# Altium PCB CP2102.PcbDoc
Units mil, origin at the board's own origin, x right, y up, seen from the top; angles counter-clockwise.
Board outline 1305 x 1305 mil, 2 copper layers (Top Layer, Bottom Layer); 24 components, 28 nets, 120 pads, 42 vias.
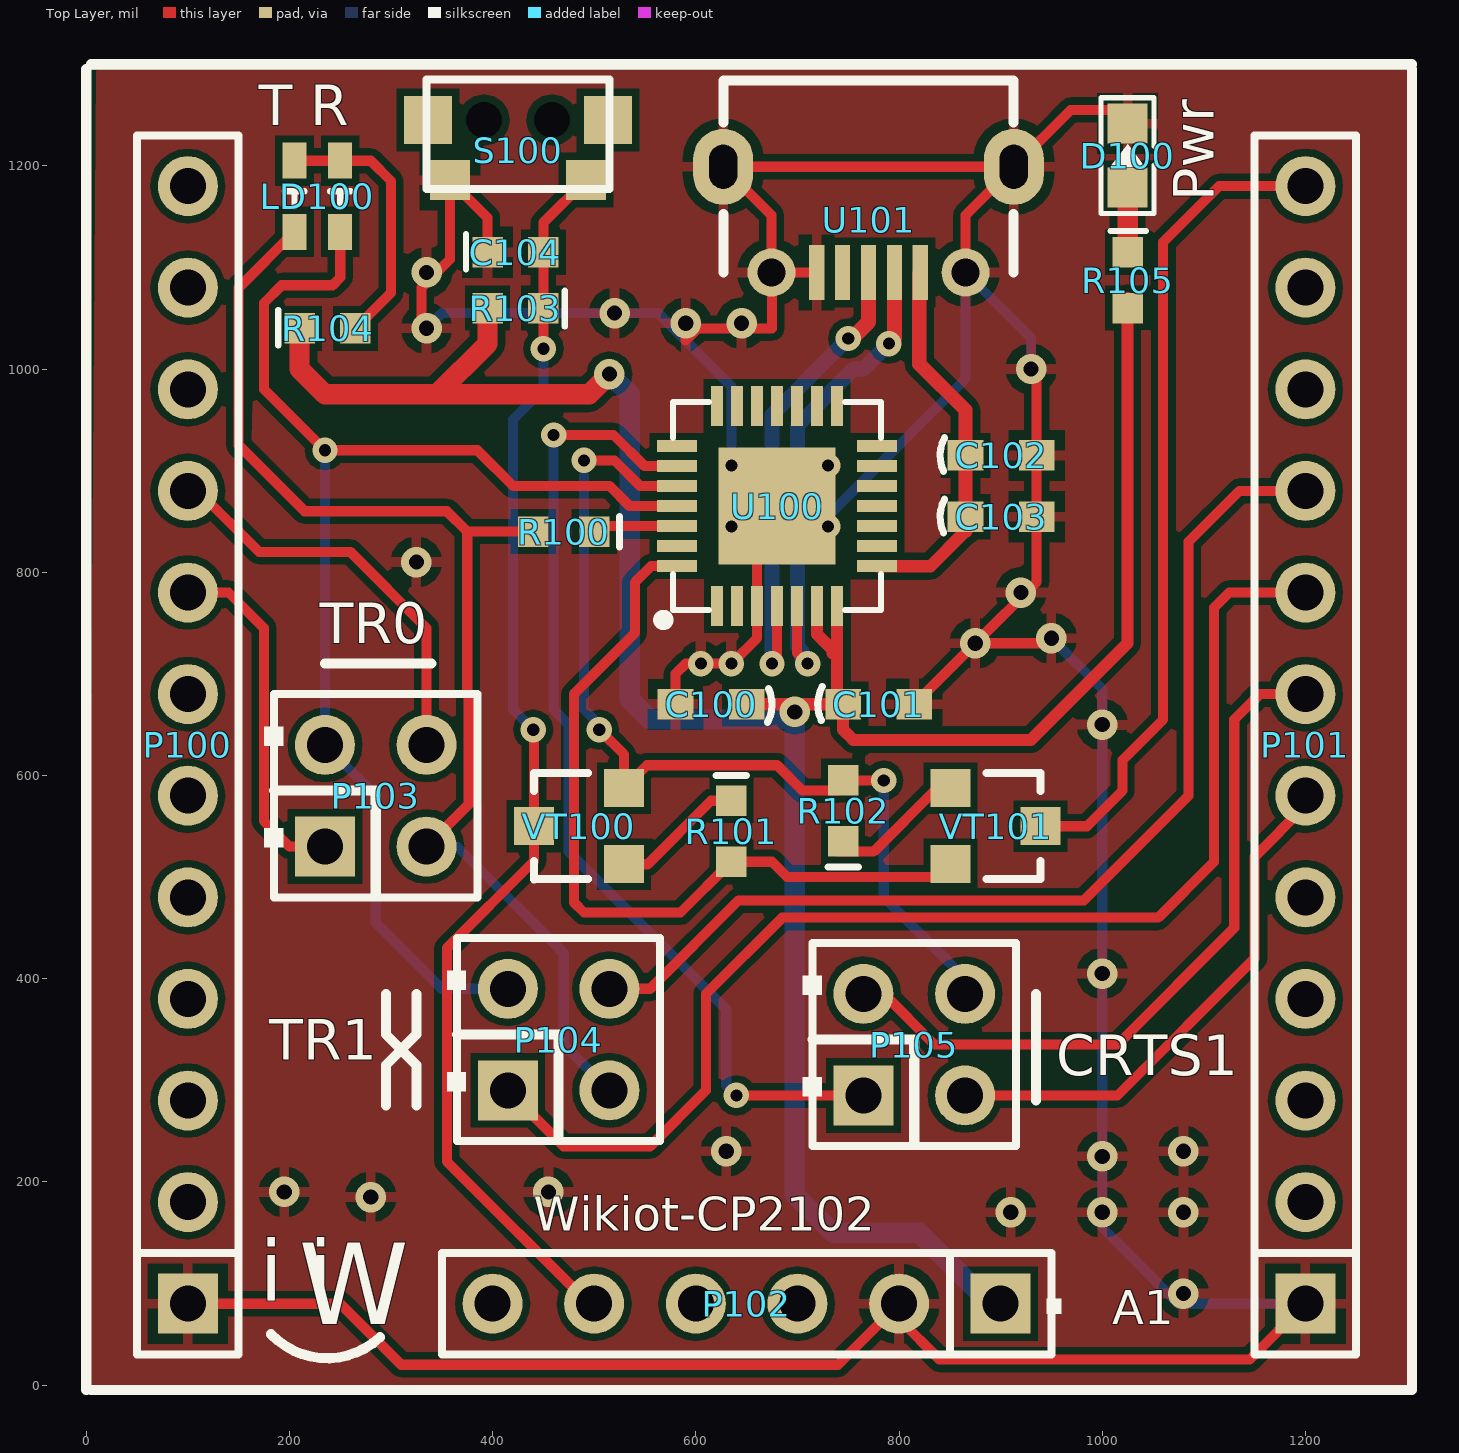
[diagram p0: Top Layer view]
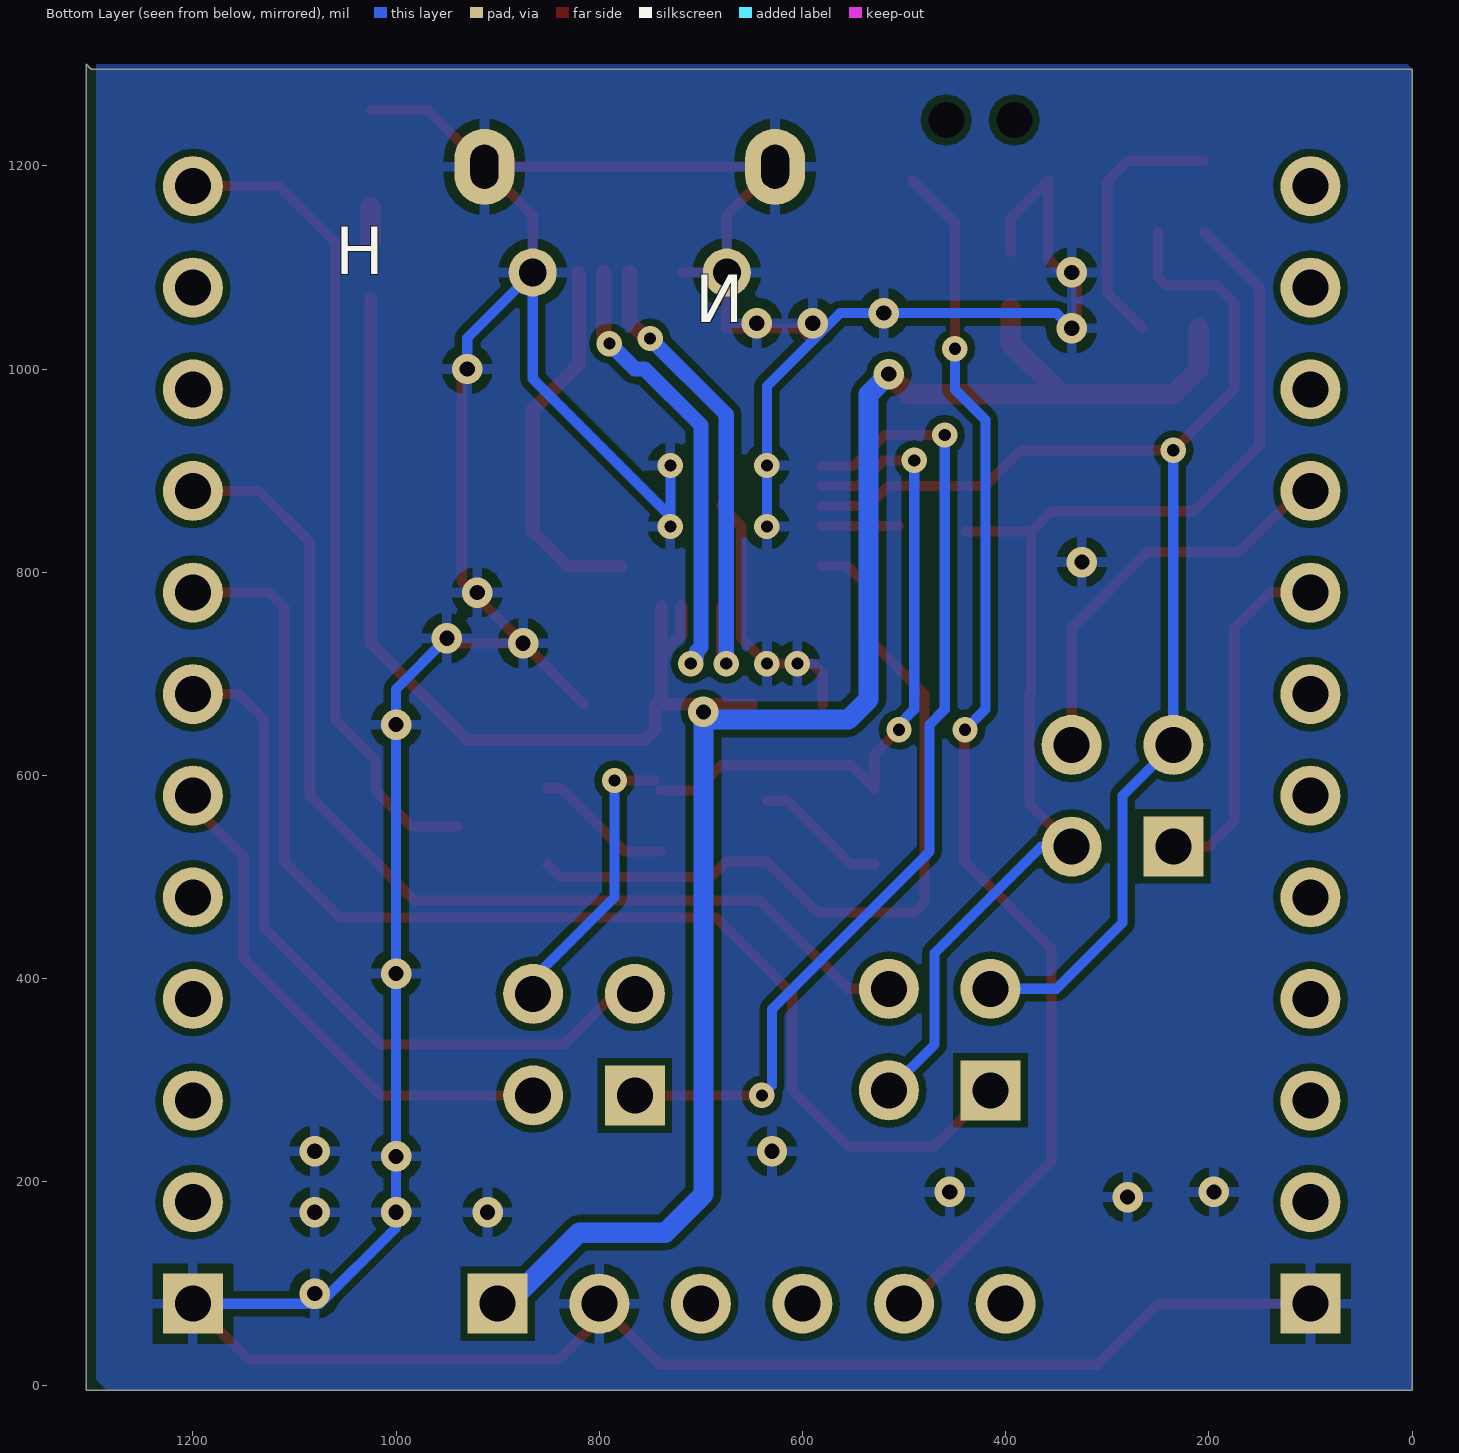
[diagram p1: Bottom Layer view, seen from below]

## Layer stack, top to bottom
Top Solder: solder mask 0.4, Solder Resist, Dk 3.5
Top Layer: signal copper 1.4
Dielectric 1: dielectric 12.6, FR-4, Dk 4.8
Bottom Layer: signal copper 1.4
Bottom Solder: solder mask 0.4, Solder Resist, Dk 3.5

## Board outline
0,-5 0,1295 1300,1295 1305,1300 1305,-5

## Design rules (kind name [scope] priority, off if disabled: settings)
Clearance [All] p1: gap=7
DiffPairsRouting [All] p1: maxlimit=10 minlimit=10 mostfreqgap=10 toplayer_minwidth=8 toplayer_maxwidth=15 toplayer_prefwidth=15 bottomlayer_minwidth=8 bottomlayer_maxwidth=15 bottomlayer_prefwidth=15 maxuncoupledlength=500
PolygonConnect [All] p1: connectstyle=Relief reliefconductorwidth=10 reliefentries=4 polygonreliefangle="90 Angle" airgapwidth=10
RoomDefinition CP2102 [InComponentClass('CP2102')] p1: confinementstyle=ConfineIn formatcopy=TRUE lockcomponents=FALSE outline 5,5 1310,5 1310,1305 5,1305
RoutingVias [All] p1: holewidth=28 width=50 viastyle="Through Hole" minholewidth=28 minwidth=50 maxholewidth=28 maxwidth=50
SolderMaskExpansion [All] p1: expansion=4
Width [All] p1: maxlimit=25 minlimit=10 preferedwidth=10 minimp=50.000000 maximp=50.000000 favimp=50.000000
29 further rules are at their usual default settings.

## Classes and differential pairs
differential pair D: +D_P -D_N

## Components (designator, comment, footprint, x,y, rotation, side; value= is the part's Value field where it differs from the comment)
C100 "10uF" C0603L 615,670 r180 top
C101 "100nF" C0603L 780,670 r0 top
C102 "10uF" C0603L 900.44,914.92 r0 top
C103 "100nF" C0603L 900.44,854.55 r0 top
C104 "100nF" 0603M 395,1115 r0 top
D100 "RED" SMT_LED_0603 1025,1210 r90 top
LD100 "LTST-C195KGJRKT" 0805-LED-Bi 225,1130 r90 top
P100 "Synio Header-L 12-Pin" HDR1X12/2.54MM 100,80 r90 top
P101 "Synio Header-R 12-Pin" HDR1X12/2.54MM 1200,80 r90 top
P102 "Synio Power Header 6 Pin" HDR1X6/2.54MM 900,80 r180 top
P103 "Header 2X2" HDR2X2/2.54MM 235,530 r0 top
P104 "Header 2X2" HDR2X2/2.54MM 415,290 r0 top
P105 "Header 2X2" HDR2X2/2.54MM 765,285 r0 top
R100 "470" R0603 470,840 r180 top
R101 "12k" R0603 635,545 r270 top
R102 "12k" R0603 745,565 r90 top
R103 "100K" 0603M 450,1060 r180 top
R104 "1K" 0603M 210,1040 r0 top
R105 "1K" 0603M 1025,1115 r270 top
S100 "RESET" KEY-2x4-SMD 425,1245 r0 top
U100 "CP2102" QFN28 680,865 r90 top
U101 "USB_Micro_5S_B" USB_MICRO_5S_B 770,1095 r0 top
VT100 "S8050" SMT_TRIODE_NPN 485,550 r90 top
VT101 "S8050" SMT_TRIODE_NPN 895,550 r270 top

## Footprints (in the part's own frame and the unit in brackets; to place one, negate y for a bottom-side part, rotate by r counter-clockwise, add the part's x,y. Pads: shape width x height; smd on the part's side, far side on the other; paste and mask are expansions set on the pad)
0603M [mil]
  rect 30x30 smd: 1(0,0) 2(55,0)
  silkscreen extent -21,-17 -21,18, body extent -5,-15 60,15, height 43
0805-LED-Bi [mm]
  rect 0.9x0.6 smd: 1(0.127,-0.635) 2(0.127,0.508) 3(1.905,0.508) 4(1.905,-0.635)
  silkscreen extent 0.76,-0.89 1.14,0.76, body extent 0.32,-1.02 1.72,0.9, height 1.1
C0603L [mil]
  rect 35x30 smd: 1(-35,0) 2(35,0)
  silkscreen extent -60,-16 -56,18, body extent -31,-16 32,15, height 24
HDR1X6/2.54MM [mm] "Connector; Header; 6 Position"
  rect 1.5x1.5 hole 0.9: 1(0,0)
  round 1.5 hole 0.9: 2(2.54,0) 3(5.08,0) 4(7.62,0) 5(10.16,0) 6(12.7,0)
  silkscreen extent -1.52,-1.27 13.97,1.27, body extent -1.32,-1.5 13.92,1.42, height 8.51
HDR1X12/2.54MM [mm] "Connector; Header; 12 Position"
  rect 1.5x1.5 hole 0.9: 1(0,0)
  round 1.5 hole 0.9: 2(2.54,0) 3(5.08,0) 4(7.62,0) 5(10.16,0) 6(12.7,0) 7(15.24,0) 8(17.78,0) 9(20.32,0) 10(22.86,0) 11(25.4,0) 12(27.94,0)
  silkscreen extent -1.27,-1.27 29.21,1.27, body extent -1.29,-1.48 29.19,1.44, height 8.51
HDR2X2/2.54MM [mm] "Connector; Header; 2x2 Position"
  rect 1.5x1.5 hole 0.9: 1(0,0)
  round 1.5 hole 0.9: 2(0,2.54) 3(2.54,0) 4(2.54,2.54)
  silkscreen extent -1.52,-1.27 3.81,3.81, body extent -1.33,-1.45 3.85,3.97, height 8.51
KEY-2x4-SMD [mm] "6.8MM,2.8MM,SMD"
  rect 1.2x1.2 smd: 0(-2.25,0) 0(2.25,0)
  rect 1x1 smd: 1(-1.7,-1.5) 2(1.7,-1.5)
  round 0.8 hole 0.9 unplated: MH1(0.85,0) MH2(-0.85,0)
  silkscreen extent -2.29,-1.73 2.29,1.02, body extent -2.28,-1.6 2.29,0.94, height 1.1
QFN28 [mm]
  rect 1x0.3 smd: 1(-2.5,1.5) 2(-2.5,1) 3(-2.5,0.5) 4(-2.5,0) 5(-2.5,-0.5) 6(-2.5,-1) 7(-2.5,-1.5) 15(2.5,-1.5) 16(2.5,-1) 17(2.5,-0.5) 18(2.5,0) 19(2.5,0.5) 20(2.5,1) 21(2.5,1.5)
  rect 0.3x1 smd: 8(-1.5,-2.5) 9(-1,-2.5) 10(-0.5,-2.5) 11(0,-2.5) 12(0.5,-2.5) 13(1,-2.5) 14(1.5,-2.5) 22(1.5,2.5) 23(1,2.5) 24(0.5,2.5) 25(0,2.5) 26(-0.5,2.5) 27(-1,2.5) 28(-1.5,2.5)
  rect 2.921x2.921 smd paste-3.2: 29(0,0)
  silkscreen extent -2.97,-2.6 2.6,2.97, body extent -2.5,-2.5 2.5,2.5, height 1
R0603 [mil]
  rect 30x30 smd: 1(-30,0) 2(30,0)
  silkscreen extent -55,-15 -55,15, body extent -31,-16 32,15, height 18
SMT_LED_0603 [mm] "SMT LED"
  rect 1x1 smd: 1(-0.8,0) 2(0.8,0)
  silkscreen extent -1.45,-0.66 1.45,0.66, body extent -0.81,-0.4 0.81,0.4, height 0.6
SMT_TRIODE_NPN [mm] "Surface mount NPN transistor, package SOT-23"
  rect 0.95x1 smd: 1(-0.95,-1.125) 2(0.95,-1.125) 3(0,1.125)
  silkscreen extent -1.33,-0.22 1.32,1.13, body extent -1.45,-1.4 1.45,1.4, height 1.3
USB_MICRO_5S_B [mil] "USB Micro SMT 5S B"
  rect 15x54 smd: 1(51,0) 2(25.5,0) 3(0,0) 4(-25.5,0) 5(-51,0)
  oval 59.06x74.8 hole 27.56 slot 43.31 at 90 deg: 6(-143,104) 7(143,104)
  round 47.24 hole 27.5: 8(95.5,0) 9(-95.5,0)
  silkscreen extent -143,0 143,189, body extent -161,-9 161,204, height 105

## Part data
C100 C101 C102 C103: library part SMT_C_0402, "Surface mount capacitor 0402"
C104: library part CAP, "Capacitor"
D100: library part LED0, "Typical INFRARED GaAs LED"
LD100: "Avago, HSMF-A203 Bi-Color LED"
P100: "Synio Header-L, 12-Pin"
P101: "Synio Header-R, 12-Pin"
P103 P104 P105: "Header, 2-Pin, Dual row"
R100 R101 R102: library part SMT_R_0402, "Surface mount resistor 0402"
R103: library part res1, "Resistor"
R104 R105: library part Res2, "Resistor"
S100: library part SW-PB, "Switch"
U101: "USB micro female SMT with 4 fixed foot"
VT100 VT101: library part SMT_TRIODE_NPN, "Surface mount NPN transistor, package SOT-23"

## Via types
v1: diameter 30, hole 15, Top Layer to Bottom Layer, 24 vias
v2: diameter 25, hole 12, Top Layer to Bottom Layer, tented both sides, 18 vias

## Nets (pads, with @x,y where several pads share a name; then routed paths per layer and width w, separated by ;. In a path a pad name is that pad's centre, name@x,y a point inside that pad or via, vN(x,y) a via of type N, cw(c..) or ccw(c..) an arc to the next point about the centre after c; other vN are vias at no path point)
ACTIVE: U100.11
CTS: P105.1 U100.23 | length 1008.8
  Top Layer w10: v2@455,935 v2(460,935) 519.04,935 549.66,904.38 U100.23 ; v2(640,285) P105.1@785,285
  Bottom Layer w10: v2(460,935) 460,665 475,650 475,525 630,370 630,295 v2(640,285)
CTS1: P101.7 P105.2 | length 718.7
  Top Layer w10: P105.2 785,385 835,335 1015,335 1130,450 1130,655 1155,680 P101.7
D3V3: C100.1 C101.1 P102.1 R103.2 R104.1 R105.2 U100.6 U100.7 | length 2630
  Top Layer w12: C100.1 v1@697.5,670 ; v1(697.5,662.5) v1@697.5,670 ; U100.6 719.37,738.94 734.81,723.5 734.81,720.28 735.09,720 739.05,720 ; U100.7 739.05,720 ; R105.2@1025,1070 R105.2 1025,730 930,635 755,635 745,645 C101.1 ; v1@697.5,670 C101.1 ; 739.05,720 739.05,675.95 C101.1
  Top Layer w20: R104.1 210,1000 235,975 345,975 ; R103.2 395,1025 345,975 ; v1(515,995) 495,975 345,975
  Bottom Layer w20: v1(515,995) 535,975 535,675 555,655 697.5,655 697.5,187.5 735,150 820,150 890,80 P102.1
D_N: U100.5 U101.2 | length 501.7
  Top Layer w10: U100.5 699.68,720.32 v2(710,710) v2@710,713.23
  Top Layer w15: v2(790,1025) 795.5,1030.5 U101.2
  Bottom Layer w15: v2@710,713.23 v2(710,710) 704.31,715.69 704.31,722.14 700,726.45 700,944.64 755.36,1000 765,1000 v2(790,1025)
D_P: U100.4 U101.3 | length 479.5
  Top Layer w10: v2(675,710) 680,715 U100.4
  Top Layer w15: v2@755,1031.45 770,1046.45 U101.3
  Bottom Layer w15: v2(675,710) 675,955 v2(750,1030)
DCD: U100.1
DSR: U100.27
DTR: R101.2 U100.28 VT101.2 | length 795
  Top Layer w10: U100.28 555.95,805.95 540,790 540,740 480,680 480,475 490,465 585,465 R101.2 675,515 690,500 838.11,500 VT101.2
GND: C100.2 C101.2 C102.2 C103.2 C104.1 D100.2 P100.1 P101.1 P102.2 S100.1 U100.3 U100.29 U101.5 U101.6 U101.7 U101.8 U101.9 | length 4831.5
  Top Layer w10: P100.1 250,80 310,20 740,20 P102.2 800,65 840,25 1145,25 P101.1 ; v1(335,1040) 330,1040 330,1080 358.07,1108.07 S100.1 395,1149.02 C104.1 ; C100.2 580,700 590,710 v2(635,710) 660.31,735.31 U100.3 660.31,845.32 U100.29 ; v1(590,1045) 590,1028 602,1040 675,1040 U101.9@675,1090 ; U101.5 U101.9 674.5,1151.5 U101.6 U101.7 ; C101.2 v1(875,730) ; U101.8 865.5,1151.5 U101.7 ; v1(930,1000) 935.44,994.56 C103.2 935.44,790.44 v1(875,730) ; v1@955,730 v1(875,730) ; D100.2@1025,1255 969,1255 U101.7
  Bottom Layer w10: v1(335,1040) 350,1055 563,1055 635,983 v2(635,845) ; v2(730,845) v2(730,905) ; v2@730,855 865.5,990.5 U101.8 930,1030.5 v1(930,1000) ; v1(950,735) 1000,685 1000,155 1075,80 P101.1
  other v1: 1080,90 910,170 1000,170 1080,170 280,185 195,190 455,190 1000,225 630,230 1080,230 1000,405 1000,650 920,780 325,810 645,1045 520,1055 335,1095
  other v2: 605,710 635,905
NetD100_1: D100.1 R105.1 | length 35
  Top Layer w20: R105.1@1025,1125 D100.1@1025,1160
NetLD100_3: LD100.3 LD100.4 R104.2 | length 262.8
  Top Layer w10: LD100.3 LD100.4 280,1205 300,1185 300,1075 R104.2
NetR100_1: R100.1 U100.26 | length 76.3
  Top Layer w10: R100.1@505.32,845.32 U100.26
NetR101_1: R101.1 VT100.1 | length 131.6
  Top Layer w10: VT100.1 552.6,512.6 615,575 R101.1
NetR102_1: R102.1 VT101.1 | length 136.6
  Top Layer w10: R102.1@740,525 775,525 837.4,587.4 VT101.1
NRST: C104.2 P102.5 R103.1 S100.2 VT100.3 | length 1242.8
  Top Layer w10: v2(440,645) 440.71,644.29 VT100.3 440.71,515.71 355,430 355,220 495,80 P102.5 ; v2(450,1020) R103.1 C104.2 450,1144.02 S100.2
  Bottom Layer w10: v2(440,645) 420,665 420,950 450,980 v2(450,1020)
OTG_ID: U101.4
PROG: P101.12 VT101.3 | length 814.6
  Top Layer w10: VT101.3 985,550 1020,585 1020,615 1060,655 1060,1125 1115,1180 P101.12
RI: U100.2
RTS: P105.4 R102.2 U100.24 VT100.2 | length 964.2
  Top Layer w10: v2(490,910) 520,910 545.31,884.69 U100.24 ; v2(505,645) 529.29,620.71 VT100.2 551.89,610 680,610 705,585 R102.2@740,585 ; R102.2 v2(785,595)
  Bottom Layer w10: v2(490,910) 490,665 v2@507.5,647.5 ; v2(785,595) 785,480 880,385 P105.4@885,385
RTS1: P101.6 P105.3 | length 521.6
  Top Layer w10: P105.3 1015,285 1150,420 1150,520 1200,570 P101.6
RX0: P100.9 P103.4 | length 405.9
  Top Layer w10: P100.9 110,880 170,820 260,820 335,745 P103.4
RX1: P101.9 P104.4 | length 1034.4
  Top Layer w10: P104.4 555,390 642,477 982,477 1085,580 1085,830 1135,880 P101.9
RXD: LD100.1 P103.2 P104.2 U100.25 | length 1312.2
  Top Layer w10: LD100.1 250,1090 242.5,1082.5 192.5,1082.5 175,1065 175,980 v2(235,920) 385,920 420,885 515,885 534.99,865.01 U100.25
  Bottom Layer w10: v2(235,920) P103.2 285,580 285,455 350,390 P104.2
TX0: P100.8 P103.1 | length 349.9
  Top Layer w10: P100.8 140,780 175,745 175,555 200,530 P103.1
TX1: P101.8 P104.1 | length 1235.6
  Top Layer w10: P104.1 470,235 555,235 610,290 610,385 685,460 1055,460 1110,515 1110,765 1125,780 P101.8
TXD: LD100.2 P103.3 P104.3 R100.2 | length 1218
  Top Layer w10: LD100.2 150,1080 150,925 215,860 355,860 375,840 ; P103.3 376.53,571.53 376.53,678.47 375,680 375,840 ; R100.2 375,840
  Bottom Layer w10: P103.3 365,530 470,425 470,335 P104.3
VDDUSB: C102.1 C103.1 U100.8 U101.1 | length 375.1
  Top Layer w12: U100.8 830.95,805.95 C103.1@865.44,840.44
  Top Layer w14: U101.1 820,1094 820,1005 865.44,959.56 C102.1 C103.1 C103.1@865.44,840.44
pads on no net: P100.2 P100.3 P100.4 P100.5 P100.6 P100.7 P100.10 P100.11 P100.12 P101.2 P101.3 P101.4 P101.5 P101.10 P101.11 P102.3 P102.4 P102.6 S100.0 S100.MH1 S100.MH2 U100.9 U100.10 U100.12 U100.13 U100.14 U100.15 U100.16 U100.17 U100.18 U100.19 U100.20 U100.21 U100.22

## Polygon pours and split planes (outlines as drawn)
GND on Bottom Layer "Top Layer-No Net" (solid, remove dead copper, pour order 2): 0,1295 5,1300 1295,1300 1295,5 1285,-5 0,-5
GND on Top Layer "Top Layer-No Net" (solid, remove dead copper, pour order 4): 10,1300 15,1295 1300,1295 1300,5 1305,0 1300,-5 0,-5

## Silkscreen, mask and mechanical layers (free items; w line width, h text height)
Top Overlay:
  lines w10: 0,-5 0,1295 ; 5,-5 1305,-5 1305,1295 ; 5,1300 1305,1300 ; 182,50 ccw(c237,102) 289,47 ; 235,710 340,710 ; 295,275 295,315 325,345 325,385 ; 295,385 295,345 325,315 325,275 ; 935,280 935,385
  text "T R" at 170,1240 h40
  text "Pwr" at 1110,1165 h40 r90
  text "TR0" at 230,730 h40
  text "TR1" at 180,320 h40
  text "CRTS1" at 955,305 h40
  text "Wikiot-CP2102" at 440.33,151.98 h33.46
  text "i i" at 171,83 h60
  text "W" at 209,60 h80
  text "A1" at 1010,60 h33.46
Bottom Overlay:
  text "H" at 1060,1078 h80
  text "N" at 658,1031 h80